# Altium PCB Handmouse.PcbDoc
Units mm, origin at the board's own origin, x right, y up, seen from the top; angles counter-clockwise.
Board outline 55.4 x 80.8 mm, 4 copper layers (Top Layer, Internal Plane 1, Internal Plane 2, Bottom Layer), stack 0.462 mm thick; 79 components, 50 nets, 245 pads, 10 vias.
Unrouted connection lines stored in the file: 145.
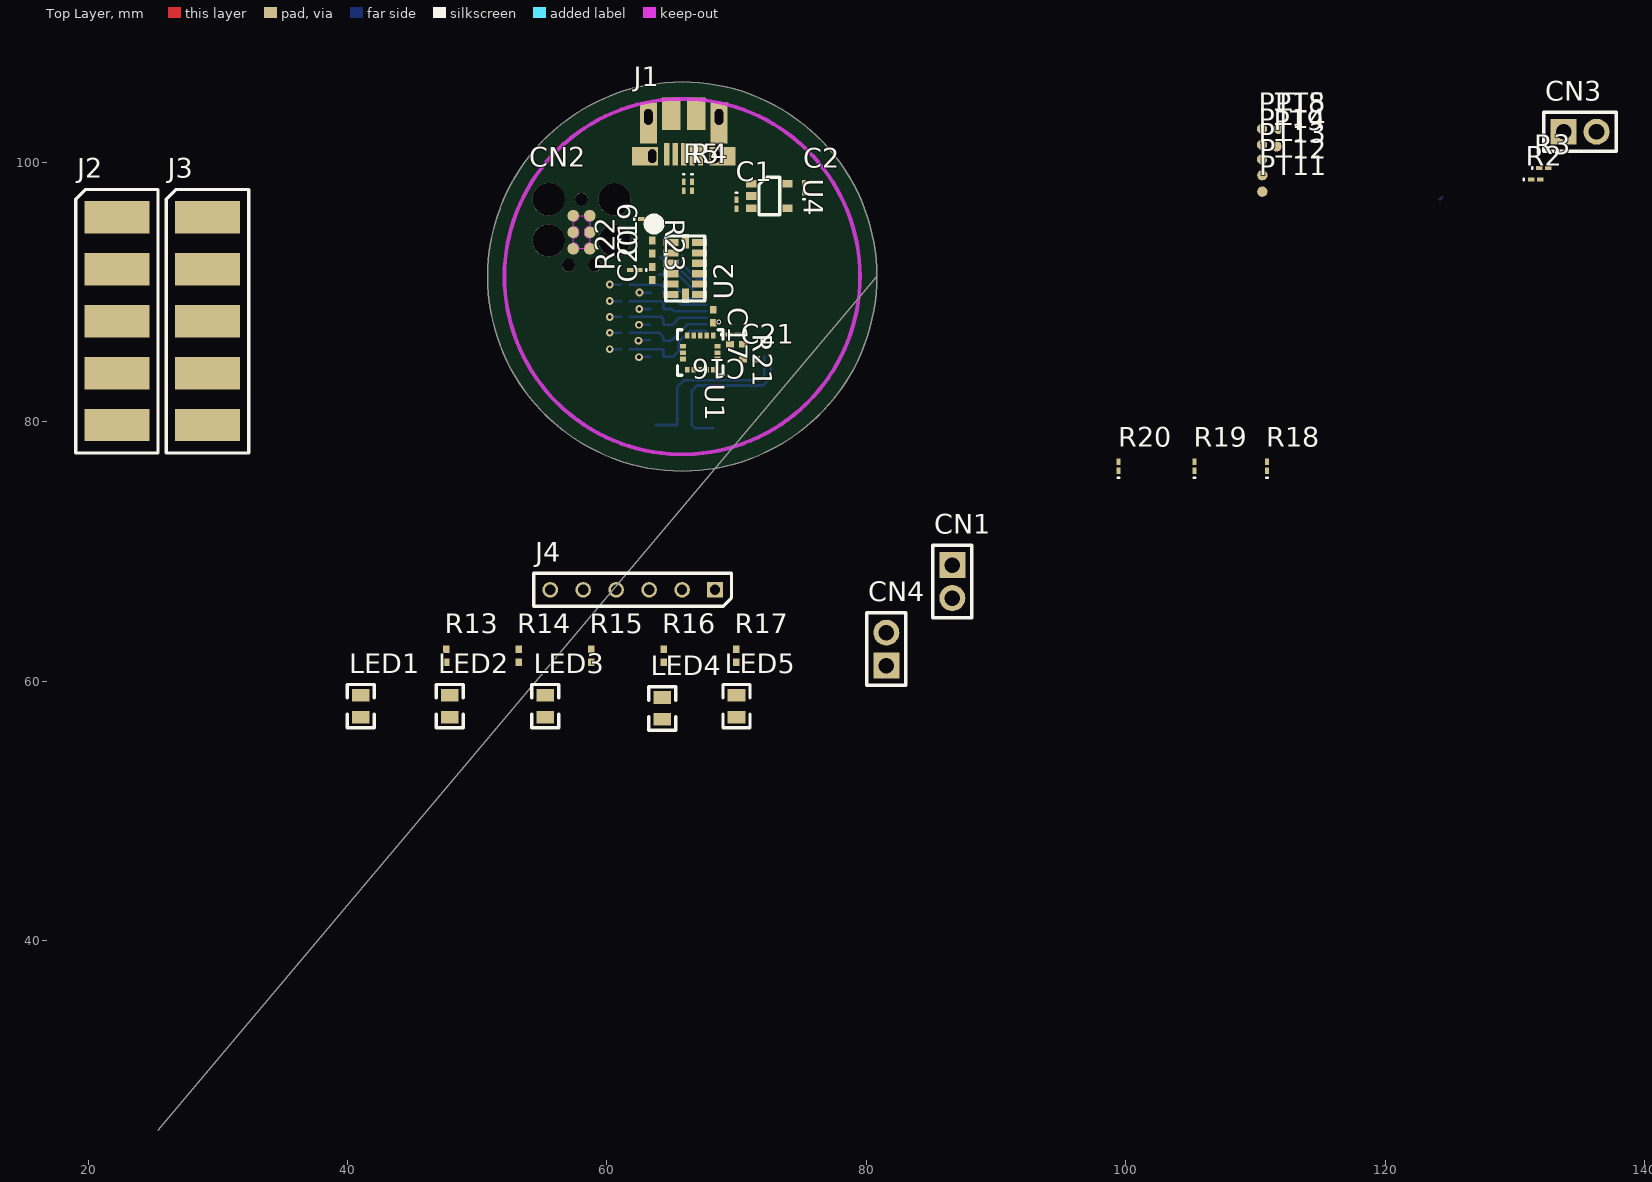
[diagram p0: Top Layer view]
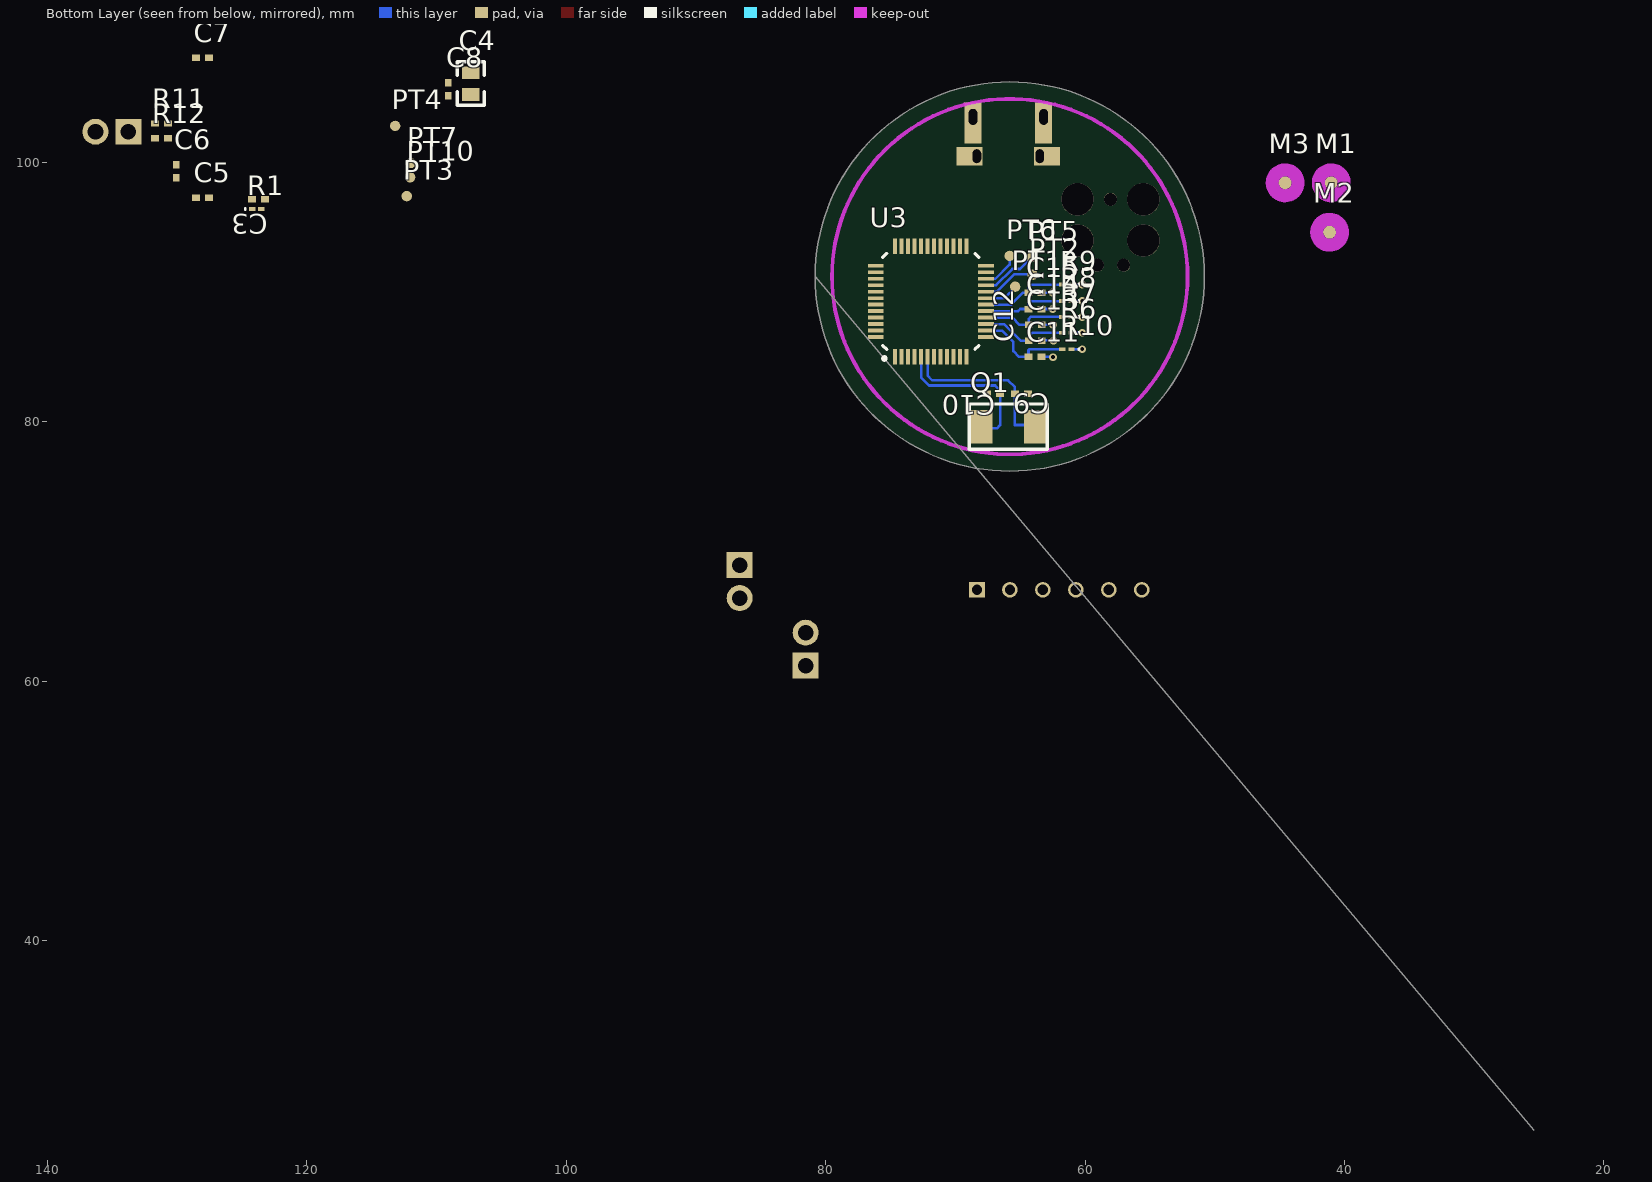
[diagram p1: Bottom Layer view, seen from below]
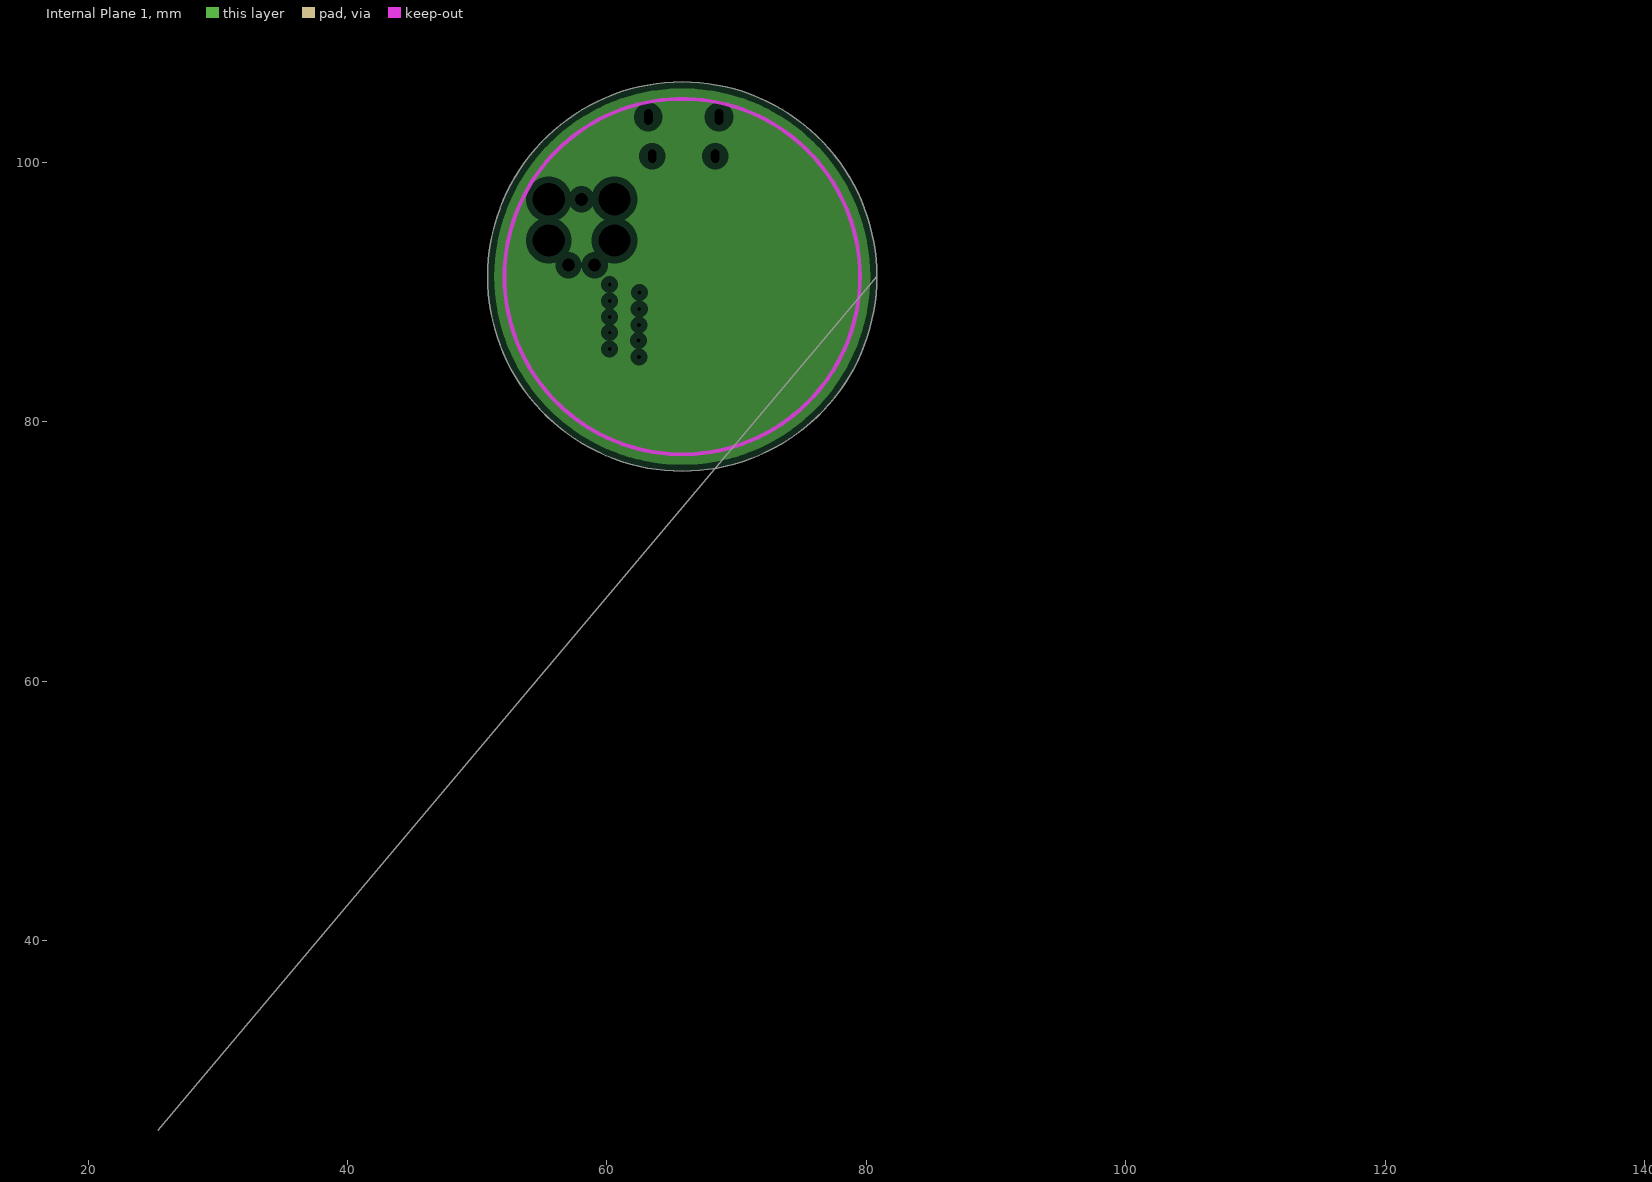
[diagram p2: Internal Plane 1, clearances drawn from the general rule]
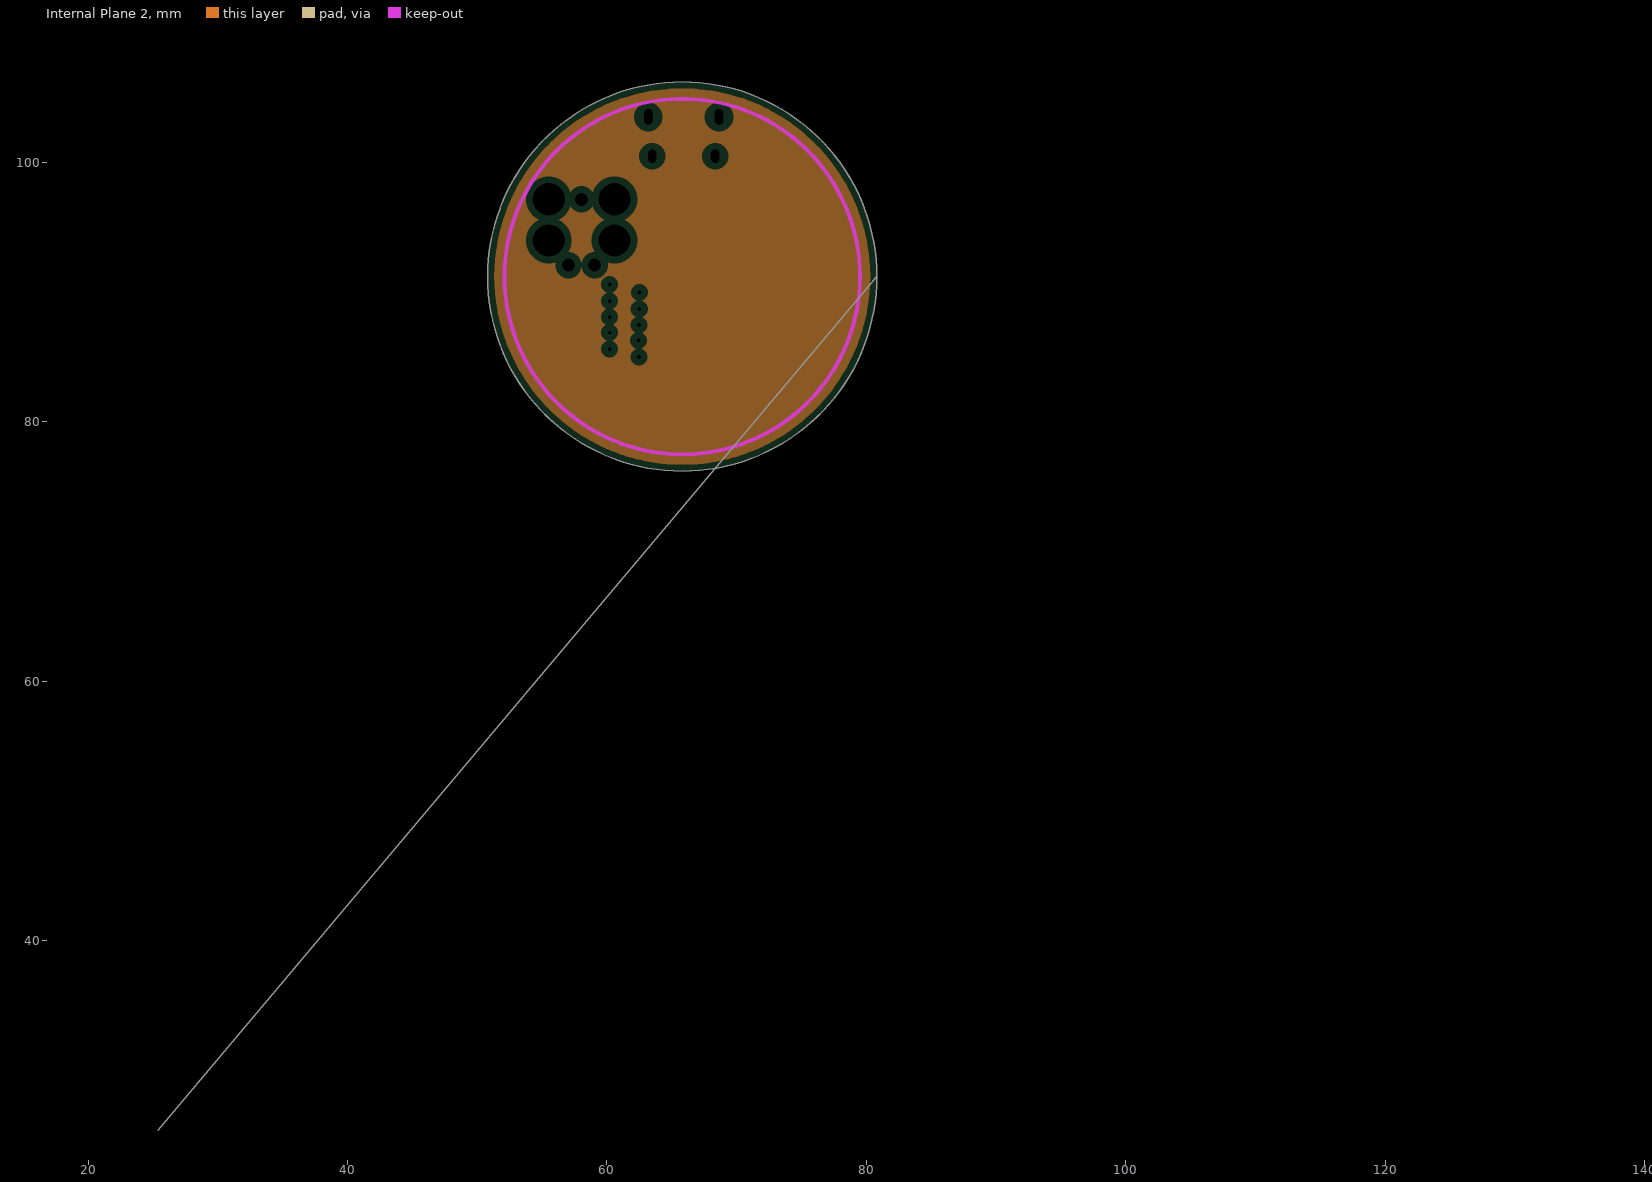
[diagram p3: Internal Plane 2, clearances drawn from the general rule]

## Layer stack, top to bottom
Top Solder: solder mask 0.0102, Solder Resist, Dk 3.5
Top Layer: signal copper 0.0356
Internal Plane 1: plane copper 0.0356
Internal Plane 2: plane copper 0.0356
Dielectric 1: dielectric 0.32, FR-4, Dk 4.8
Bottom Layer: signal copper 0.0356
Bottom Solder: solder mask 0.0102, Solder Resist, Dk 3.5

## Board outline
80.8,91.2 ccw(c65.8,91.2) 65.8,106.2 ccw(c65.8,91.2) 50.8,91.2 ccw(c65.8,91.2) 65.8,76.2 ccw(c65.8,91.2) 25.4,25.4

## Design rules (kind name [scope] priority, off if disabled: settings)
Clearance [All] p1: gap=0.2
DiffPairsRouting [All] p1: maxlimit=0.254 minlimit=0.254 mostfreqgap=0.254 toplayer_minwidth=0.381 toplayer_maxwidth=0.381 toplayer_prefwidth=0.381 bottomlayer_minwidth=0.381 bottomlayer_maxwidth=0.381 bottomlayer_prefwidth=0.381 maxuncoupledlength=12.7
PlaneClearance [All] p1: clearance=0.508
PlaneConnect [All] p1: planeconnectstyle=Relief reliefexpansion=0.508 reliefentries=4 reliefconductorwidth=0.254 reliefairgap=0.254
PolygonConnect [All] p1: connectstyle=Relief reliefconductorwidth=0.254 reliefentries=4 polygonreliefangle="90 Angle" airgapwidth=0.254
RoomDefinition Handmouse [InComponentClass('Handmouse')] p1: confinementstyle=ConfineOut formatcopy=TRUE lockcomponents=FALSE outline 5.207,41.148 118.999,41.148 118.999,45.974 5.207,45.974
RoutingVias [All] p1: holewidth=0.3 width=0.55 viastyle="Through Hole" minholewidth=0.25 minwidth=0.3 maxholewidth=0.9 maxwidth=1.3
SolderMaskExpansion [All] p1: expansion=0.102
UnpouredPolygon [All] p1: allowunpoured=FALSE
Width [All] p1: maxlimit=0.2 minlimit=0.2 preferedwidth=0.2
26 further rules are at their usual default settings.

## Classes and differential pairs
differential pair USB: +USB_P -USB_N

## Components (designator, comment, footprint, x,y, rotation, side; value= is the part's Value field where it differs from the comment)
C1 "RD401-021A" 0603 69.977,96.774 r270 top
C2 "RD401-021A" 0603 75.184,98.044 r90 top
C3 "RD401-033A" 0402 123.698,97.155 r0 bottom
C4 "Value" 0805 107.35,106.07 r270 bottom
C5 "RD401-033A" 0402 128.016,97.282 r180 bottom
C6 "RD401-033A" 0402 130.048,99.314 r90 bottom
C7 "RD401-033A" 0402 128.016,108.077 r180 bottom
C8 "RD401-033A" 0402 109.07,105.63 r270 bottom
C9 "22pF" 0402 67.056,82.169 r180 bottom
C10 "22pF" 0402 64.897,82.169 r0 bottom
C11 "RD401-008A" 0402 63.856,85.014 r0 bottom
C12 "RD401-008A" 0402 63.83,86.258 r0 bottom
C13 "RD401-008A" 0402 63.83,87.478 r0 bottom
C14 "RD401-008A" 0402 63.856,88.697 r0 bottom
C15 "RD401-008A" 0402 63.856,89.967 r0 bottom
C16 "RD401-033A" 0402 69.977,85.979 r180 top
C17 "RD401-033A" 0402 68.199,88.138 r270 top
C19 "RD401-033A" 0402 63.5,93.472 r90 top
C20 "RD401-033A" 0402 63.5,91.44 r90 top
C21 "RD401-037A" 0402 70.993,84.836 r180 top
CN1 "RD408-013A" "PinHead 2*1 M" 86.614,68.961 r270 top
CN2 "RD408-022A" TC2030-IDC-FP 58.039,97.155 r270 top
CN3 "RD408-013A" "PinHead 2*1 M" 133.731,102.362 r0 top
CN4 "RD408-013A" "PinHead 2*1 M" 81.534,61.214 r90 top
J1 "CONN_FCI_10103594-0001LF" CONN_10103594-0001LF 65.913,103.505 r180 top
J2 "Pad_1X5" PCBComponent_1 22.225,87.757 r270 top
J3 "Pad_1X5" PCBComponent_1 29.21,87.757 r270 top
J4 "HE10_2.54_1X6" "PCBComponent_1 - duplicate" 68.326,67.056 r180 top
LED1 "RD405-006A" 0805 41.021,58.088 r90 top
LED2 "RD405-006A" 0805 47.879,58.088 r90 top
LED3 "RD405-006A" 0805 55.245,58.088 r90 top
LED4 "RD405-006A" 0805 64.262,57.912 r90 top
LED5 "RD405-006A" 0805 69.977,58.088 r90 top
M1 "mire" Mire 41.021,98.425 r90 bottom
M2 "mire" Mire 41.148,94.615 r180 bottom
M3 "mire" Mire 44.577,98.425 r180 bottom
PT1 "PT 0.8mm" Pastille_0.8mm 65.38,90.42 r90 bottom
PT2 "PT 0.8mm" Pastille_0.8mm 64.04,91.33 r90 bottom
PT3 "PT 0.8mm" Pastille_0.8mm 112.28,97.4 r90 bottom
PT4 "PT 0.8mm" Pastille_0.8mm 113.17,102.81 r90 bottom
PT5 "PT 0.8mm" Pastille_0.8mm 64.11,92.69 r90 bottom
PT6 "PT 0.8mm" Pastille_0.8mm 65.81,92.79 r90 bottom
PT7 "PT 0.8mm" Pastille_0.8mm 111.98,99.95 r90 bottom
PT8 "PT 0.8mm" Pastille_0.8mm 111.76,102.59 r90 top
PT9 "PT 0.8mm" Pastille_0.8mm 111.62,101.23 r90 top
PT10 "PT 0.8mm" Pastille_0.8mm 112.02,98.85 r90 bottom
PT11 "PT 0.8mm" Pastille_0.8mm 110.51,97.74 r180 top
PT12 "PT 0.8mm" Pastille_0.8mm 110.51,99.01 r180 top
PT13 "PT 0.8mm" Pastille_0.8mm 110.49,100.23 r180 top
PT14 "PT 0.8mm" Pastille_0.8mm 110.49,101.36 r180 top
PT15 "PT 0.8mm" Pastille_0.8mm 110.49,102.58 r180 top
Q1 "Quartz_16MHz" "PCBComponent_1 - duplicate2" 65.913,79.629 r180 bottom
R1 "RD403-054A" 0603 123.825,96.393 r180 bottom
R2 "RD403-046A" 0603 131.572,98.679 r0 top
R3 "RD403-046A" 0603 132.207,99.568 r0 top
R4 "RD403-044A" 0603 66.548,98.171 r270 top
R5 "RD403-044A" 0603 65.913,98.171 r270 top
R6 "RD403-054A" 0603 61.392,86.868 r0 bottom
R7 "RD403-054A" 0603 61.392,88.087 r0 bottom
R8 "RD403-054A" 0603 61.392,89.306 r0 bottom
R9 "RD403-054A" 0603 61.392,90.576 r0 bottom
R10 "RD403-054A" 0603 61.392,85.598 r0 bottom
R11 "100k" 0402 131.191,102.997 r0 bottom
R12 "100k" 0402 131.191,101.854 r180 bottom
R13 "330" 0402 47.625,61.976 r90 top
R14 "330" 0402 53.213,61.976 r90 top
R15 "330" 0402 58.801,61.976 r90 top
R16 "330" 0402 64.389,61.976 r90 top
R17 "330" 0402 69.977,61.976 r90 top
R18 "RD403-044A" 0603 110.871,76.581 r90 top
R19 "RD403-044A" 0603 105.283,76.581 r90 top
R20 "RD403-044A" 0603 99.441,76.581 r90 top
R21 "RD403-044A" 0603 69.723,86.741 r0 top
R22 "RD403-044A" 0603 62.128,91.694 r180 top
R23 "RD403-044A" 0603 62.992,95.631 r0 top
U1 "RD498-005A" LGA_50P_300X300_16 67.183,85.344 r180 top
U2 "ADXL345BCCZ" "PCBComponent_1 - duplicate1" 66.04,91.821 r0 top
U3 "RD421-006A" LQFP48 71.882,89.281 r180 bottom
U4 "REGUL_3V3" SOIC95P280X130-5 72.517,97.409 r270 top

## Footprints (in the part's own frame and the unit in brackets; to place one, negate y for a bottom-side part, rotate by r counter-clockwise, add the part's x,y. Pads: shape width x height; smd on the part's side, far side on the other; paste and mask are expansions set on the pad)
0402 [mm] "Chip Capacitor, Body 1.0x0.5mm, IPC High Density"
  rect 0.6x0.5 smd: 1(-0.5,0) 2(0.5,0)
  body extent -0.55,-0.3 0.55,0.3, height 1.3
0603 [mm] "Chip Inductor, Body 0.6x0.3mm, IPC High Density"
  rect 0.5x0.3 smd: 1(-0.35,0) 2(0.35,0)
  silkscreen extent -0.9,-0.05 -0.9,0.05, body extent -0.33,-0.18 0.33,0.18, height 0.55
0805 [mm]
  rect 0.97x1.37 smd: 1(-0.84,0) 2(0.84,0)
  silkscreen extent -1.68,-1.04 1.68,1.04, body extent -1,-0.62 1,0.63, height 0.78
CONN_10103594-0001LF [mm]
  rect 0.4x1.75 smd: 1(-1.3,2.875) 2(-0.65,2.875) 3(0,2.875) 4(0.65,2.875) 5(1.3,2.875)
  rect 2x1.4 hole 0.65 slot 1.05 at 90 deg copper offset 0.575,0: 7(2.425,3.03)
  rect 2x1.4 hole 0.65 slot 1.05 at 90 deg copper offset -0.575,0: 8(-2.425,3.03)
  rect 1.3x3.15 hole 0.65 slot 1.2 at 90 deg copper offset 0,0.475: 9(2.725,0) 10(-2.725,0)
  rect 1.425x2.5 smd: 11(0.962,-0.25) 12(-0.962,-0.25)
LGA_50P_300X300_16 [mm]
  rect 0.35x0.45 smd mask+0.1: 1(-1,-1.325) 2(-0.5,-1.325) 3(0,-1.325) 4(0.5,-1.325) 5(1,-1.325) 9(1,1.325) 10(0.5,1.325) 11(0,1.325) 12(-0.5,1.325) 13(-1,1.325)
  rect 0.45x0.35 smd mask+0.1: 6(1.325,-0.5) 7(1.325,0) 8(1.325,0.5) 14(-1.325,0.5) 15(-1.325,0) 16(-1.325,-0.5)
  silkscreen extent -1.75,-1.75 1.75,1.75, body extent -1.57,-1.57 1.58,1.58, height 1
LQFP48 [mm]
  rect 0.3x1.2 smd: 1(-2.75,-4.25) 2(-2.25,-4.25) 3(-1.75,-4.25) 4(-1.25,-4.25) 5(-0.75,-4.25) 6(-0.25,-4.25) 7(0.25,-4.25) 8(0.75,-4.25) 9(1.25,-4.25) 10(1.75,-4.25) 11(2.25,-4.25) 12(2.75,-4.25) 25(2.75,4.25) 26(2.25,4.25) 27(1.75,4.25) 28(1.25,4.25) 29(0.75,4.25) 30(0.25,4.25) 31(-0.25,4.25) 32(-0.75,4.25) 33(-1.25,4.25) 34(-1.75,4.25) 35(-2.25,4.25) 36(-2.75,4.25)
  rect 1.2x0.3 smd: 13(4.25,-2.75) 14(4.25,-2.25) 15(4.25,-1.75) 16(4.25,-1.25) 17(4.25,-0.75) 18(4.25,-0.25) 19(4.25,0.25) 20(4.25,0.75) 21(4.25,1.25) 22(4.25,1.75) 23(4.25,2.25) 24(4.25,2.75) 37(-4.25,2.75) 38(-4.25,2.25) 39(-4.25,1.75) 40(-4.25,1.25) 41(-4.25,0.75) 42(-4.25,0.25) 43(-4.25,-0.25) 44(-4.25,-0.75) 45(-4.25,-1.25) 46(-4.25,-1.75) 47(-4.25,-2.25) 48(-4.25,-2.75)
  silkscreen extent -3.71,-4.52 3.7,3.7, body extent -4.6,-4.6 4.6,4.6, height 1.6
Mire [mm]
  round 1 smd paste-1 mask+1: 0(0,0)
  Top Layer keep-out circle w1: c0,0 r1
Pastille_0.8mm [mm]
  round 0.8 smd: 1(0,0)
PCBComponent_1 [mm]
  rect 2.5x5 smd: 1(-8,0) 2(-4,0) 3(0,0) 4(4,0) 5(8,0)
  silkscreen extent -10.16,-3.18 10.16,3.18
"PCBComponent_1 - duplicate" [mm]
  rect 1.2x1.2 hole 0.8: 1(0,0)
  round 1.2 hole 0.8: 2(2.54,0) 3(5.08,0) 4(7.62,0) 5(10.16,0) 6(12.7,0)
  silkscreen extent -1.27,-1.27 13.97,1.27
"PCBComponent_1 - duplicate1" [mm]
  rect 1.145x0.55 smd: 1(-1.098,2) 2(-1.098,1.2) 3(-1.098,0.4) 4(-1.098,-0.4) 5(-1.098,-1.2) 6(-1.098,-2) 8(1.098,-2) 9(1.098,-1.2) 10(1.098,-0.4) 11(1.098,0.4) 12(1.098,1.2) 13(1.098,2)
  rect 0.55x1.145 smd: 7(0,-2.097) 14(0,2.097)
  silkscreen extent -2.81,-2.5 1.5,3.83, body extent -1.52,-2.54 1.52,2.54, height 1
"PCBComponent_1 - duplicate2" [mm]
  rect 1.9x2.6 smd: 1(-2.15,0) 2(2.15,0)
  silkscreen extent -3,-1.75 3,1.75
"PinHead 2*1 M" [mm]
  rect 2x2 hole 1.2: 1(0,0)
  round 2 hole 1.2: 2(2.54,0)
  silkscreen extent -1.52,-1.5 4.06,1.5, body extent -1.17,-1.25 3.91,1.25, height 9.4
SOIC95P280X130-5 [mm]
  rect 0.6x0.8 smd: 1(-0.95,-1.4) 2(0,-1.4) 3(0.95,-1.4) 4(0.95,1.4) 5(-0.95,1.4)
  silkscreen extent -1.45,-0.8 1.45,0.8
TC2030-IDC-FP [mm]
  round 0.9 smd paste-1 mask+0: 1(1.27,-0.635) 2(1.27,0.635) 3(2.54,-0.635) 4(2.54,0.635) 5(3.81,-0.635) 6(3.81,0.635)
  round 1 hole 1 unplated paste+0 mask+0: 9(0,0) 9(5.08,-1.016) 9(5.08,1.016)
  round 2.5 hole 2.5 unplated paste+0 mask+0: 10(3.175,2.54) 11(0,2.54) 12(0,-2.54) 13(3.175,-2.54)
  Top Layer keep-out region: 1.257,-0.175 1.257,0.165 1.255,0.171 1.255,0.177 1.258,0.182 1.258,0.182 1.261,0.184 1.261,0.184 1.261,0.184 1.261,0.184 1.261,0.184 1.261,0.184 1.265,0.187 1.27,0.188 1.27,0.188 1.441,0.222 1.586,0.319 1.683,0.464 1.717,0.635 1.717,0.635 1.718,0.64 1.721,0.644 1.725,0.647 1.73,0.648 1.73,0.648 2.08,0.648 2.085,0.647 2.089,0.644 2.092,0.64 2.093,0.635 2.093,0.635 2.137,0.441 2.261,0.286 2.441,0.199 2.639,0.199 2.819,0.286 2.943,0.441 2.987,0.635 2.987,0.635 2.988,0.64 2.991,0.644 2.995,0.647 3,0.648 3,0.648 3.35,0.648 3.355,0.647 3.359,0.644 3.362,0.64 3.363,0.635 3.363,0.635 3.397,0.464 3.494,0.319 3.639,0.222 3.81,0.188 3.81,0.188 3.815,0.187 3.819,0.184 3.822,0.18 3.823,0.175 3.823,0.175 3.823,-0.175 3.822,-0.18 3.819,-0.184 3.815,-0.187 3.81,-0.188 3.81,-0.188 3.639,-0.222 3.494,-0.319 3.397,-0.464 3.363,-0.635 3.363,-0.635 3.362,-0.64 3.359,-0.644 3.355,-0.647 3.35,-0.648 3.35,-0.648 3,-0.648 2.995,-0.647 2.991,-0.644 2.988,-0.64 2.987,-0.635 2.987,-0.635 2.943,-0.441 2.819,-0.286 2.639,-0.199 2.441,-0.199 2.261,-0.286 2.137,-0.441 2.093,-0.635 2.093,-0.635 2.092,-0.64 2.089,-0.644 2.085,-0.647 2.08,-0.648 2.08,-0.648 1.73,-0.648 1.725,-0.647 1.721,-0.644 1.718,-0.64 1.717,-0.635 1.717,-0.635 1.683,-0.464 1.586,-0.319 1.441,-0.222 1.27,-0.188 1.27,-0.188 1.265,-0.187 1.261,-0.184 1.258,-0.18 1.257,-0.175

## Part data
C1 C2: "CAP CER 0603 1uF 25V X7R 10%"
C3 C5 C6 C7 C8 C16 C17 C19 C20: "CAP CER 0402 0.1uF 16V X7R 5%"
C4: library part RD401-025A, "CAP CER 0805 4.7uF 16V X7R 10%"
C9 C10: library part RD401-009A, "CAP CER 0402 22pF 25V COG 1%"
C11 C12 C13 C14 C15: "CAP CER 0402 10nF 16V X7R 5%"
C21: "CAP CER 0402 10nF 50V X7R 10%"
CN1 CN3 CN4: "JUMPER"
CN2: "CON SWD"
J1: "CONN MICROUSB FCI 10103594-0001LF"
LED1 LED2 LED3 LED4 LED5: "DIO LED SMT ? 30mA Rouge"
PT1 PT2 PT3 PT4 PT5 PT6 PT7 PT8 PT9 PT10 PT11 PT12 PT13 PT14 PT15: "Point de test pastille 0.8mm"
Q1: "Quartz 16MHz"
R1 R6 R7 R8 R9 R10: "RES 0603 10K 1% 0.1W"
R2 R3: "RES 0603 4.7K 1% 0.1W"
R4 R5 R18 R19 R20 R21 R22 R23: "RES 0603 0 1% 0.1W"
R11 R12: library part RD403-007A, "RES 0402 100k 1% 0.063W"
R13 R14 R15 R16 R17: library part RD403-014A, "RES 0402 330 1% 0.063W"
U1: "Gyroscopes MEMS motion sensor 3axis digital output"
U3: "STM32F070C6T6"

## Via types
v1: diameter 0.6, hole 0.3, Top Layer to Bottom Layer, 10 vias

## Nets (pads, with @x,y where several pads share a name; then routed paths per layer and width w, separated by ;. In a path a pad name is that pad's centre, name@x,y a point inside that pad or via, vN(x,y) a via of type N, cw(c..) or ccw(c..) an arc to the next point about the centre after c; other vN are vias at no path point)
ADC_IN4: C11.2 J2.5 PT11.1 R10.2 U3.14 | length 7.7
  Bottom Layer w0.2: R10.2 64.262,85.598 64.356,85.504 C11.2 65.084,85.014 65.52,85.45 65.52,86.14 66.411,87.031 U3.14
ADC_IN5: C12.2 J2.4 PT12.1 R6.2 U3.15 | length 6.9
  Bottom Layer w0.2: R6.2 64.059,86.868 64.33,86.597 C12.2 64.968,86.258 66.241,87.531 U3.15
ADC_IN6: C13.2 J2.3 PT13.1 R7.2 U3.16 | length 6.6
  Bottom Layer w0.2: R7.2 64.186,88.087 64.33,87.943 C13.2 65.048,87.478 65.601,88.031 U3.16
ADC_IN7: C14.2 J2.2 PT14.1 R8.2 U3.17 | length 6.5
  Bottom Layer w0.2: R8.2@61.742,89.297 64.195,89.297 64.356,89.137 C14.2 64.983,88.697 65.149,88.531 U3.17
ADC_IN8: C15.2 J2.1 PT15.1 R9.2 U3.18 | length 6.8
  Bottom Layer w0.2: R9.2 64.135,90.576 64.356,90.356 C15.2 64.763,89.967 65.699,89.031 U3.18
BOOT0: CN3.1 CN4.2 R11.1 R12.2 U3.44
GND: C1.1 C2.1 C3.1 C4.1 C5.1 C6.1 C7.1 C8.1 C9.1 C10.1 C11.1 C12.1 C13.1 C14.1 C15.1 C16.1 C17.1 C19.1 C20.1 C21.1 CN1.1 CN2.5 CN4.1 J1.5 J4.1 LED1.2 LED2.2 LED3.2 LED4.2 LED5.2 R6.1 R7.1 R8.1 R9.1 R10.1 R12.1 U1.4 U1.8 U1.9 U1.10 U1.11 U1.12 U1.13 U2.2 U2.4 U2.5 U2.12 U3.8 U3.23 U3.35 U3.47 U4.2 | length 8.4
  Bottom Layer w0.2: v1@60.214,85.598 R10.1 ; v1@60.214,86.868 R6.1 ; v1@60.214,88.087 R7.1 ; v1@60.214,89.306 R8.1 ; v1@60.214,90.576 R9.1 ; v1(62.433,86.258) 62.459,86.284 C12.1@63.305,86.284 ; v1(62.459,84.988) 62.484,85.014 C11.1@63.33,85.014 ; v1(62.459,87.478) C13.1@63.305,87.478 ; v1(62.484,88.697) C14.1@63.33,88.697 ; v1(62.509,89.967) C15.1
  other v1: 60.21,85.602 60.21,86.872 60.21,88.091 60.21,89.31 60.21,90.58
I2C1_SCL: PT8.1 R2.1 R19.2 U1.2 U2.14
I2C1_SDA: PT9.1 R3.1 R20.2 U1.3 U2.13
LED_1: R13.2 U3.39
LED_2: R14.2 U3.40
LED_3: R15.2 U3.41
LED_4: R16.2 U3.42
LED_5: R17.2 U3.43
NetC16_2: C16.2 C17.2 R21.1 U1.1 U1.15 U1.16
NetC19_2: C19.2 C20.2 R22.1 U2.1 U2.3 U2.6 U2.11
NetC21_2: C21.2 U1.14
NetCN2_3: CN2.3 R23.1
NetJ1_2: J1.2 R4.1
NetJ1_3: J1.3 R5.1
NetLED1_1: LED1.1 R13.1
NetLED2_1: LED2.1 R14.1
NetLED3_1: LED3.1 R15.1
NetLED4_1: LED4.1 R16.1
NetLED5_1: LED5.1 R17.1
NetPT1_1: PT1.1 U3.19 | length 2.9
  Bottom Layer w0.2: PT1.1@65.33,90.68 65.33,90.4 66.199,89.531 U3.19
NetPT2_1: PT2.1 U3.20 | length 4.2
  Bottom Layer w0.2: PT2.1 64.09,91.38 65.431,91.38 66.78,90.031 U3.20
NetPT3_1: PT3.1 U3.29
NetPT4_1: PT4.1 U3.30
NetPT5_1: PT5.1 U3.21 | length 4.4
  Bottom Layer w0.2: PT5.1 65.02,91.78 65.596,91.78 66.845,90.531 U3.21
NetPT6_1: PT6.1 U3.22 | length 2.9
  Bottom Layer w0.2: PT6.1 65.81,92.132 66.911,91.031 U3.22
NetPT7_1: PT7.1 U3.2
NetR18_1: R18.1 U3.1 U3.24 U3.36 U3.48
NetR19_1: R19.1 U3.45
NetR20_1: R20.1 U3.46
NRST: C3.2 CN1.2 R1.1 R23.2 U3.7 | length 0.2
  Bottom Layer w0.2: C3.2 C3.2@124.337,97.294
OSCIN: C9.2 Q1.1 U3.5 | length 12.5
  Bottom Layer w0.2: Q1.1@68.199,79.502 66.802,79.502 66.548,79.756 66.548,82.423 66.929,82.804 72.009,82.804 72.632,83.427 U3.5
OSCOUT: C10.2 Q1.2 U3.6 | length 13.1
  Bottom Layer w0.2: Q1.2@63.763,79.756 65.405,79.756 65.405,82.677 65.932,83.204 71.774,83.204 72.136,83.566 U3.6@72.136,85.031
SWDCLK: CN2.4 U3.37
SWDIO: CN2.2 U3.34
SWITCH: PT10.1 U3.38
USART2_CTS: J4.6 U3.10
USART2_RTS: J4.2 U3.11
USART2_RX: J4.4 U3.13
USART2_TX: J4.5 U3.12
USB_N: R4.2 U3.32
USB_P: R5.2 U3.33
VCC_3V3: C2.2 C4.2 C5.2 C6.2 C7.2 C8.2 CN2.1 CN3.2 J3.1 J3.2 J3.3 J3.4 J3.5 R1.2 R2.2 R3.2 R11.2 R18.2 R21.2 R22.2 U1.5 U2.7 U4.5
VCC_5V: C1.2 J1.1 U4.1 U4.3
VCC_FTDI: J4.3
pads on no net: CN2.6 CN2.9 CN2.10 CN2.11 CN2.12 CN2.13 J1.4 J1.7 J1.8 J1.9 J1.10 J1.11 J1.12 M1.0 M2.0 M3.0 U1.6 U1.7 U2.8 U2.9 U2.10 U3.3 U3.4 U3.9 U3.25 U3.26 U3.27 U3.28 U3.31 U4.4

## Keep-outs
Keep-Out Layer:
  circle w0.3: c65.8,91.2 r13.7

## Silkscreen, mask and mechanical layers (free items; w line width, h text height)
Drill Drawing:
  text ".LEGEND" at 43.589,59.612 h1.52
  text "Drill Drawing." at 43.589,57.072 h1.52

## Dimensions
79.5,91.2 to 52.1,91.2 on Mechanical 1

## Text inside footprints (layer, text, board x,y; h text height)
U1: Top Overlay "o" at 68.834,87.884 h0.5 r180